# Altium PCB Stofzuiger.PcbDoc
Units mil, origin at the board's own origin, x right, y up, seen from the top; angles counter-clockwise.
Board outline 6000 x 4000 mil, 2 copper layers (Top Layer, Bottom Layer); 74 components, 61 nets, 290 pads, 0 vias.
Unrouted connection lines stored in the file: 176.
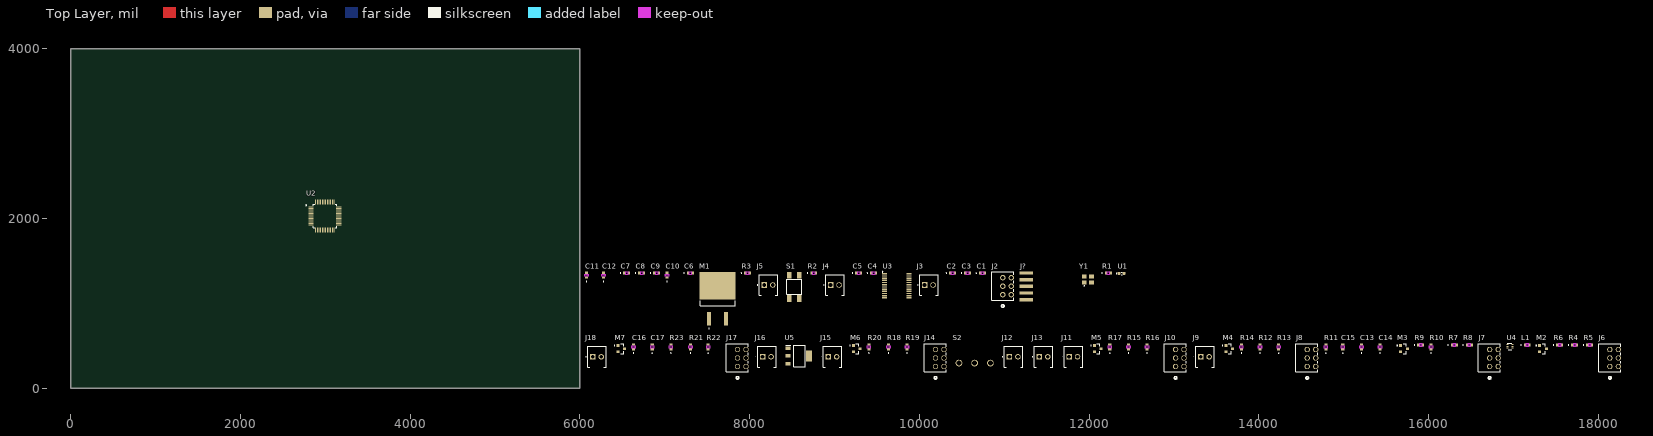
[diagram p0: Top Layer view]
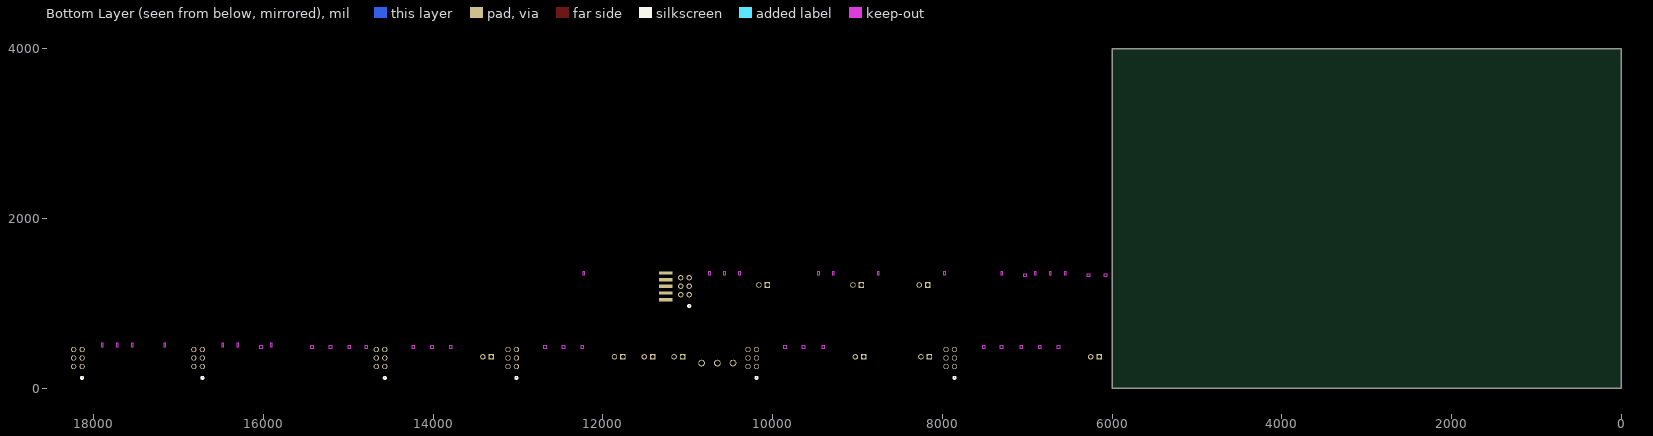
[diagram p1: Bottom Layer view, seen from below]

## Layer stack, top to bottom
Top Solder: solder mask 0.4, Solder Resist, Dk 3.5
Top Layer: signal copper 1.4
Dielectric 1: dielectric 12.6, FR-4, Dk 4.8
Bottom Layer: signal copper 1.4
Bottom Solder: solder mask 0.4, Solder Resist, Dk 3.5

## Board outline
0,0 6000,0 6000,4000 0,4000

## Design rules (kind name [scope] priority, off if disabled: settings)
Clearance [All] p1: gap=10 ignorepadtopadclearanceinfootprint=FALSE
PolygonConnect [All] p1: connectstyle=Relief reliefconductorwidth=10 reliefentries=4 polygonreliefangle="90 Angle" airgapwidth=10
RoutingVias [All] p1: holewidth=28 width=50 viastyle="Through Hole" minholewidth=28 minwidth=50 maxholewidth=28 maxwidth=50
SolderMaskExpansion [All] p1: expansion=4 istentingtop=FALSE
SupplyNets "Schematic Supply Nets_4" [InNet('+5')] p1: voltage=0.000
SupplyNets "Schematic Supply Nets_3" [InNet('VSS')] p2: voltage=0.000
SupplyNets "Schematic Supply Nets_2" [InNet('VDD')] p3: voltage=0.000
SupplyNets "Schematic Supply Nets_1" [InNet('+5V')] p4: voltage=0.000
SupplyNets "Schematic Supply Nets" [InNet('Battery')] p5: voltage=0.000
Width [All] p1: maxlimit=10 minlimit=10 preferedwidth=10
30 further rules are at their usual default settings.

## Classes and differential pairs
net class IR[5..0]: IR0 IR1 IR2 IR3 IR4 IR5
net class DRUK[5..0]: DRUK0 DRUK1 DRUK2 DRUK3 DRUK4 DRUK5
net class ADC[5..0]: ADC0 ADC1 ADC2 ADC3 ADC4 ADC5
component class Stofzuiger: C1 C2 C3 C4 C5 C6 C7 C8 C9 C10 C11 C12 J2 J3 J4 J5 J? M1 R1 R2 R3 R? S1 S? U1 U2 U3 Y1
component class Designator: C13 C14 C15 C16 C17 J6 J7 J8 J9 J10 J11 J12 J13 J14 J15 J16 J17 J18 L1 L? M2 M3 M4 M5 M6 M7 R4 R5 R6 R7 R8 R9 R10 R11 R12 R13 R14 R15 R16 R17 R18 R19 R20 R21 R22 R23 R? S2 S? U4 U5

## Components (designator, comment, footprint, x,y, rotation, side; value= is the part's Value field where it differs from the comment)
C1 "100nF" 0603 10717.11,1357.4 r0 top
C2 "10µF" 0603 10363.74,1357.4 r0 top
C3 "100nF" 0603 10540.92,1357.4 r0 top
C4 "10µF" 0603 9432.6,1357.4 r0 top
C5 "100nF" 0603 9256.41,1357.4 r0 top
C6 "100nF" 0603 7273.04,1357.4 r0 top
C7 "1µF" 0603 6522.02,1357.4 r0 top
C8 "100nF" 0603 6699.19,1357.4 r0 top
C9 "1µF" 0603 6876.37,1357.4 r0 top
C10 "100nF" 0603 7026.97,1307.2 r90 top
C11 "1µF" 0603 6076.13,1307.2 r90 top
C12 "100nF" 0603 6275.95,1307.2 r90 top
C13 "22µF" 0603 15211.42,459.72 r90 top
C14 "22µF" 0603 15430.92,459.72 r90 top
C15 "10µF" 0603 14990.94,459.72 r90 top
C16 "100nF" 0603 6631.28,459.72 r90 top
C17 "10µF" 0603 6851.76,459.72 r90 top
J2 "MPT 0,5 3-2,54" "MPT 0,5 3-2,54" 10983.85,1104.43 r90 top
J3 "MPT 0,5 2-2,54" "MPT 0,5 2-2,54" 10061.56,1217.63 r0 top
J4 "MPT 0,5 2-2,54" "MPT 0,5 2-2,54" 8953.24,1217.63 r0 top
J5 "MPT 0,5 2-2,54" "MPT 0,5 2-2,54" 8172.69,1217.63 r0 top
J6 "MPT 0,5 3-2,54" "MPT 0,5 3-2,54" 18139.71,256.95 r90 top
J7 "MPT 0,5 3-2,54" "MPT 0,5 3-2,54" 16722.32,256.95 r90 top
J8 "MPT 0,5 3-2,54" "MPT 0,5 3-2,54" 14571.63,256.95 r90 top
J9 "MPT 0,5 2-2,54" "MPT 0,5 2-2,54" 13315.66,371.13 r0 top
J10 "MPT 0,5 3-2,54" "MPT 0,5 3-2,54" 13020.37,256.95 r90 top
J11 "MPT 0,5 2-2,54" "MPT 0,5 2-2,54" 11764.4,371.13 r0 top
J12 "MPT 0,5 2-2,54" "MPT 0,5 2-2,54" 11062.6,371.13 r0 top
J13 "MPT 0,5 2-2,54" "MPT 0,5 2-2,54" 11413.99,371.13 r0 top
J14 "MPT 0,5 3-2,54" "MPT 0,5 3-2,54" 10190.51,256.95 r90 top
J15 "MPT 0,5 2-2,54" "MPT 0,5 2-2,54" 8924.7,371.13 r0 top
J16 "MPT 0,5 2-2,54" "MPT 0,5 2-2,54" 8152.02,371.13 r0 top
J17 "MPT 0,5 3-2,54" "MPT 0,5 3-2,54" 7856.73,256.95 r90 top
J18 "MPT 0,5 2-2,54" "MPT 0,5 2-2,54" 6150.94,371.13 r0 top
J? "STLINK-V3MINIE" STLINK-V3MINIE 11258.47,1359.37 r0 top
L1 "1µ" 0603 17138.68,509.92 r0 top
M1 "IPB022N12NM6" IPB022N12NM6 7621.48,1014.86 r90 top
M2 "BSS316N" BSS316N 17350.3,466.61 r0 top
M3 "BSS316N" BSS316N 15712.43,466.61 r0 top
M4 "BSS316N" BSS316N 13652.29,466.61 r0 top
M5 "BSS316N" BSS316N 12102.02,466.61 r0 top
M6 "BSS316N" BSS316N 9262.31,466.61 r0 top
M7 "BSS316N" BSS316N 6487.57,466.61 r0 top
R1 "330R" 0603 12200.45,1357.4 r0 top
R2 "4k7" 0603 8727.84,1357.4 r0 top
R3 "weerstand" 0603 7947.29,1357.4 r0 top
R4 "3k3" 0603 17696.78,509.92 r0 top
R5 "6k8" 0603 17873.95,509.92 r0 top
R6 "weerstand" 0603 17519.6,509.92 r0 top
R7 "3k3" 0603 16279.39,509.92 r0 top
R8 "6k8" 0603 16455.58,509.92 r0 top
R9 "732k" 0603 15881.73,509.92 r0 top
R10 "weerstand" 0603 16032.33,459.72 r90 top
R11 "100k" 0603 14791.12,459.72 r90 top
R12 "3k3" 0603 14015.5,459.72 r90 top
R13 "6k8" 0603 14235.98,459.72 r90 top
R14 "weerstand" 0603 13796,459.72 r90 top
R15 "3k3" 0603 12465.22,459.72 r90 top
R16 "6k8" 0603 12684.72,459.72 r90 top
R17 "weerstand" 0603 12244.74,459.72 r90 top
R18 "3k3" 0603 9635.36,459.72 r90 top
R19 "6k8" 0603 9854.86,459.72 r90 top
R20 "weerstand" 0603 9405.04,459.72 r90 top
R21 "3k3" 0603 7301.59,459.72 r90 top
R22 "6k8" 0603 7511.24,459.72 r90 top
R23 "weerstand" 0603 7071.26,459.72 r90 top
S1 "button" BUTTON 8525.07,1192.04 r90 top
S2 "MTS-103-A2" MTS-103-A2 10652.14,297.31 r0 top
U1 "LED" LED 12383.53,1354.45 r0 top
U2 "STM32L053C8T6" stm32l053c8t6 2993.11,2031.5 r0 top
U3 "TB6612FNG" TB6612FNG 9734.78,1207.78 r0 top
U4 "TPS61023DRLR" TPS61023DRLR 16962.49,494.17 r0 top
U5 "NCV4274C" NCV4274C 8576.25,381.96 r0 top
Y1 "AU-24.000MBE-T" AU-24.000MBE-T 11986.85,1282.59 r0 top

## Footprints (in the part's own frame and the unit in brackets; to place one, negate y for a bottom-side part, rotate by r counter-clockwise, add the part's x,y. Pads: shape width x height; smd on the part's side, far side on the other; paste and mask are expansions set on the pad)
0603 [mil]
  rect 26x36 smd paste+0 mask+0: 1(0,0) 2(55,0)
  Top Layer keep-out region: 15,-17 15,17 40,17 40,-17
  Keep-Out Layer region: 15,-19 15,19 40,19 40,-19
  silkscreen extent -49,-3 -43,3, body extent -7,-19 62,19, height 35
AU-24.000MBE-T [mm]
  rect 1.4x1.2 smd: 1(-1.1,-0.85) 2(1.1,-0.85) 3(1.1,0.85) 4(-1.1,0.85)
  silkscreen extent -1.1,-1.95 -1,-1.85, body extent -1.68,-1.33 1.68,1.33, height 1.2
BSS316N [mm]
  rect 0.9x0.8 smd: 1(-1,0.95) 2(-1,-0.95) 3(1,0)
  silkscreen extent -2.1,-1.45 0.65,1.45, body extent -1.3,-1.53 1.3,1.52, height 1.3
BUTTON [mm]
  rect 2x1.4 smd: A1(-3.4,1.5) A2(3.6,1.5) B1(-3.4,-1.5) B2(3.6,-1.5)
  silkscreen extent -2.15,-2.25 2.35,2.25, body extent -3.65,-2.25 3.85,2.25, height 3.8
IPB022N12NM6 [mm]
  rect 4.05x1.27 smd: 1(-4.887,2.54) 2(-4.887,-2.54)
  rect 8.3x10.8 smd paste-6: 3(4.888,0)
  silkscreen extent -8.01,-5.25 0.42,5.25, body extent -6.56,-5.25 8.68,5.25, height 4.7
LED [mm]
  rrect53% 0.91x0.83 smd: A(0.75,0) C(-0.75,0)
  silkscreen extent -1.4,-0.4 0.14,0.4, body extent -0.8,-0.4 0.8,0.4, height 0.7
"MPT 0,5 2-2,54" [mm]
  rect 1.65x1.65 hole 1.1: 1(0,0)
  round 1.65 hole 1.1: 2(2.54,0)
  round 0.55 hole 1.1 unplated: MH1(0,-2.54) MH2(2.54,-2.54)
  silkscreen extent -2.1,-3.1 4.04,3.1, body extent -1.53,-3.05 4.07,3.15, height 8.5
"MPT 0,5 3-2,54" [mil]
  round 63 / inner round 60 / far side round 63 hole 43 paste-99999 mask+0: 1(0,0) 2(100,0) 3(200,0) 4(0,-100) 5(100,-100) 6(200,-100)
  silkscreen extent -149,-127 270,133, body extent -60,-120 261,124, height 335
MTS-103-A2 [mm]
  round 2 hole 1.5: 1(-4.7,0) 2(0,0) 3(4.7,0)
  body extent -6.79,-6 6.6,6, height 30.63
NCV4274C [mm]
  rect 1.6x1 smd: 1(-3.15,2.3) 2(-3.15,0) 3(-3.15,-2.3)
  rect 1.8x3.3 smd: 4(3.15,0)
  silkscreen extent -3.9,-3.25 2.05,3.25, body extent -3.06,-3.29 3.9,3.21, height 1.65
STLINK-V3MINIE [mm]
  rect 4x1 smd paste-0.025 mask+0.05: 1(0,0) 2(0,-2) 3(0,-4) 4(0,-6) 5(0,-8)
  rect 4x1 smd far side paste-0.025 mask+0.05: 6(0.004,0.01) 7(0.004,-1.99) 8(0.004,-3.99) 9(0.004,-5.99) 10(0.004,-7.99)
stm32l053c8t6 [mm]
  rrect7% 1.56x0.28 smd: 1(-4.18,2.75) 2(-4.18,2.25) 3(-4.18,1.75) 4(-4.18,1.25) 5(-4.18,0.75) 6(-4.18,0.25) 7(-4.18,-0.25) 8(-4.18,-0.75) 9(-4.18,-1.25) 10(-4.18,-1.75) 11(-4.18,-2.25) 12(-4.18,-2.75) 25(4.18,-2.75) 26(4.18,-2.25) 27(4.18,-1.75) 28(4.18,-1.25) 29(4.18,-0.75) 30(4.18,-0.25) 31(4.18,0.25) 32(4.18,0.75) 33(4.18,1.25) 34(4.18,1.75) 35(4.18,2.25) 36(4.18,2.75)
  rrect7% 0.28x1.56 smd: 13(-2.75,-4.18) 14(-2.25,-4.18) 15(-1.75,-4.18) 16(-1.25,-4.18) 17(-0.75,-4.18) 18(-0.25,-4.18) 19(0.25,-4.18) 20(0.75,-4.18) 21(1.25,-4.18) 22(1.75,-4.18) 23(2.25,-4.18) 24(2.75,-4.18) 37(2.75,4.18) 38(2.25,4.18) 39(1.75,4.18) 40(1.25,4.18) 41(0.75,4.18) 42(0.25,4.18) 43(-0.25,4.18) 44(-0.75,4.18) 45(-1.25,4.18) 46(-1.75,4.18) 47(-2.25,4.18) 48(-2.75,4.18)
  silkscreen extent -5.7,-3.5 3.5,3.5
TB6612FNG [mm]
  rect 1.5x0.4 smd: 1(-3.625,3.575) 2(-3.625,2.925) 3(-3.625,2.275) 4(-3.625,1.625) 5(-3.625,0.975) 6(-3.625,0.325) 7(-3.625,-0.325) 8(-3.625,-0.975) 9(-3.625,-1.625) 10(-3.625,-2.275) 11(-3.625,-2.925) 12(-3.625,-3.575) 13(3.625,-3.575) 14(3.625,-2.925) 15(3.625,-2.275) 16(3.625,-1.625) 17(3.625,-0.975) 18(3.625,-0.325) 19(3.625,0.325) 20(3.625,0.975) 21(3.625,1.625) 22(3.625,2.275) 23(3.625,2.925) 24(3.625,3.575)
  silkscreen extent -4.35,4.1 -4.15,4.3, body extent -3.8,-4.15 3.8,4.15, height 1.6
TPS61023DRLR [mm]
  rect 0.67x0.3 smd: 1(-0.74,0.5) 2(-0.74,0) 3(-0.74,-0.5) 4(0.74,-0.5) 5(0.74,0) 6(0.74,0.5)
  silkscreen extent -0.89,-0.94 0.51,0.94, body extent -0.8,-0.8 0.8,0.8, height 0.6

## Part data
C1 C3 C5 C11 C12 C13 C14 C15 C16 C17: library part cap
C2 C4: library part elco
C6 C7 C8 C9 C10: library part Condensator
L1: library part spoel
R1 R2 R4 R5 R7 R8 R9 R11 R12 R13 R15 R16 R18 R19 R21 R22: library part weerstand

## Nets (pads, with @x,y where several pads share a name; then routed paths per layer and width w, separated by ;. In a path a pad name is that pad's centre, name@x,y a point inside that pad or via, vN(x,y) a via of type N, cw(c..) or ccw(c..) an arc to the next point about the centre after c; other vN are vias at no path point)
+5: C2.1 C3.1 C13.1 C14.1 C16.1 R9.1 U3.13 U3.14 U3.24 U4.6 U5.1
+5V: J6.1 J7.1 J8.1 J10.1 J14.1 J17.1
ADC0: R4.2 R5.1 U2.10
ADC1: R7.2 R8.1 U2.11
ADC2: R12.2 R13.1 U2.12
ADC3: R15.2 R16.1 U2.13
ADC4: R18.2 R19.1 U2.14
ADC5: R21.2 R22.1 U2.15
AIN1: U2.28 U3.21
AIN2: U2.27 U3.22
Battery: C15.2 J5.1 L1.1 S2.2 U4.2 U4.3
BIN1: U2.25 U3.17
BIN2: U2.22 U3.16
CH1: U2.38 U3.23
CH3: U2.21 U3.15
DRUK0: J9.1 U2.41
DRUK1: J11.1 U2.40
DRUK2: J13.1 U2.39
DRUK3: J15.1 U2.20
DRUK4: J16.1 U2.19
DRUK5: J18.1 U2.18
IR: J2.3 U2.45
IR0: M2.1 R6.2 U2.16
IR1: M3.1 R10.2 U2.17
IR2: M4.1 R14.2 U2.29
IR3: M5.1 R17.2 U2.30
IR4: M6.1 R20.2 U2.31
IR5: M7.1 R23.2 U2.32
NetC6_2: C6.2 R2.1
NetJ3_1: J3.1 U3.1 U3.2
NetJ3_2: J3.2 U3.5 U3.6
NetJ4_1: J4.1 U3.7 U3.8
NetJ4_2: J4.2 U3.12
NetJ5_2: J5.2 M1.3
NetJ6_2: J6.2 M2.3
NetJ6_3: J6.3 R4.1
NetJ7_2: J7.2 M3.3
NetJ7_3: J7.3 R7.1
NetJ8_2: J8.2 M4.3
NetJ8_3: J8.3 R12.1
NetJ10_2: J10.2 M5.3
NetJ10_3: J10.3 R15.1
NetJ12_1: J12.1 S2.1
NetJ14_2: J14.2 M6.3
NetJ14_3: J14.3 R18.1
NetJ17_2: J17.2 M7.3
NetJ17_3: J17.3 R21.1
NetL1_2: L1.2 U4.5
NetR1_2: R1.2 U1.A
NetR9_2: R9.2 R11.1 U4.1
OSC: U2.5 Y1.3
RST: J?.9 S1.B1 U2.7
RX: J?.7 U2.43
STATUS: R1.1 U2.33
STBY: U2.26 U3.19
STOF: M1.1 R3.2 U2.46
SWCLK: J?.4 U2.37
SWDIO: J?.3 U2.34
TX: J?.8 U2.42
VDD: C1.1 C4.1 C5.1 C7.2 C8.2 C9.2 C10.2 C11.2 C12.2 C17.2 J2.1 J?.10 R2.2 U2.9 U2.24 U2.36 U2.48 U3.20 U5.3 Y1.1 Y1.4
VSS: C1.2 C2.2 C3.2 C4.2 C5.2 C6.1 C7.1 C8.1 C9.1 C10.1 C11.1 C12.1 C13.2 C14.2 C15.1 C16.2 C17.1 J2.2 J9.2 J11.2 J12.2 J13.2 J15.2 J16.2 J18.2 J?.6 M1.2 M2.2 M3.2 M4.2 M5.2 M6.2 M7.2 R3.1 R5.2 R6.1 R8.2 R10.1 R11.2 R13.2 R14.1 R16.2 R17.1 R19.2 R20.1 R22.2 R23.1 S1.A1 U1.C U2.8 U2.23 U2.35 U2.44 U2.47 U3.3 U3.4 U3.9 U3.10 U3.18 U4.4 U5.2 U5.4 Y1.2
pads on no net: J2.4 J2.5 J2.6 J3.MH1 J3.MH2 J4.MH1 J4.MH2 J5.MH1 J5.MH2 J6.4 J6.5 J6.6 J7.4 J7.5 J7.6 J8.4 J8.5 J8.6 J9.MH1 J9.MH2 J10.4 J10.5 J10.6 J11.MH1 J11.MH2 J12.MH1 J12.MH2 J13.MH1 J13.MH2 J14.4 J14.5 J14.6 J15.MH1 J15.MH2 J16.MH1 J16.MH2 J17.4 J17.5 J17.6 J18.MH1 J18.MH2 J?.1 J?.2 J?.5 S1.A2 S1.B2 S2.3 U2.1 U2.2 U2.3 U2.4 U2.6 U3.11